# Altium PCB ScopeDefl.PcbDoc
Units mil, origin at the board's own origin, x right, y up, seen from the top; angles counter-clockwise.
Board outline 3100 x 2900 mil, 2 copper layers (Top Layer, Bottom Layer); 70 components, 48 nets, 171 pads, 29 vias.
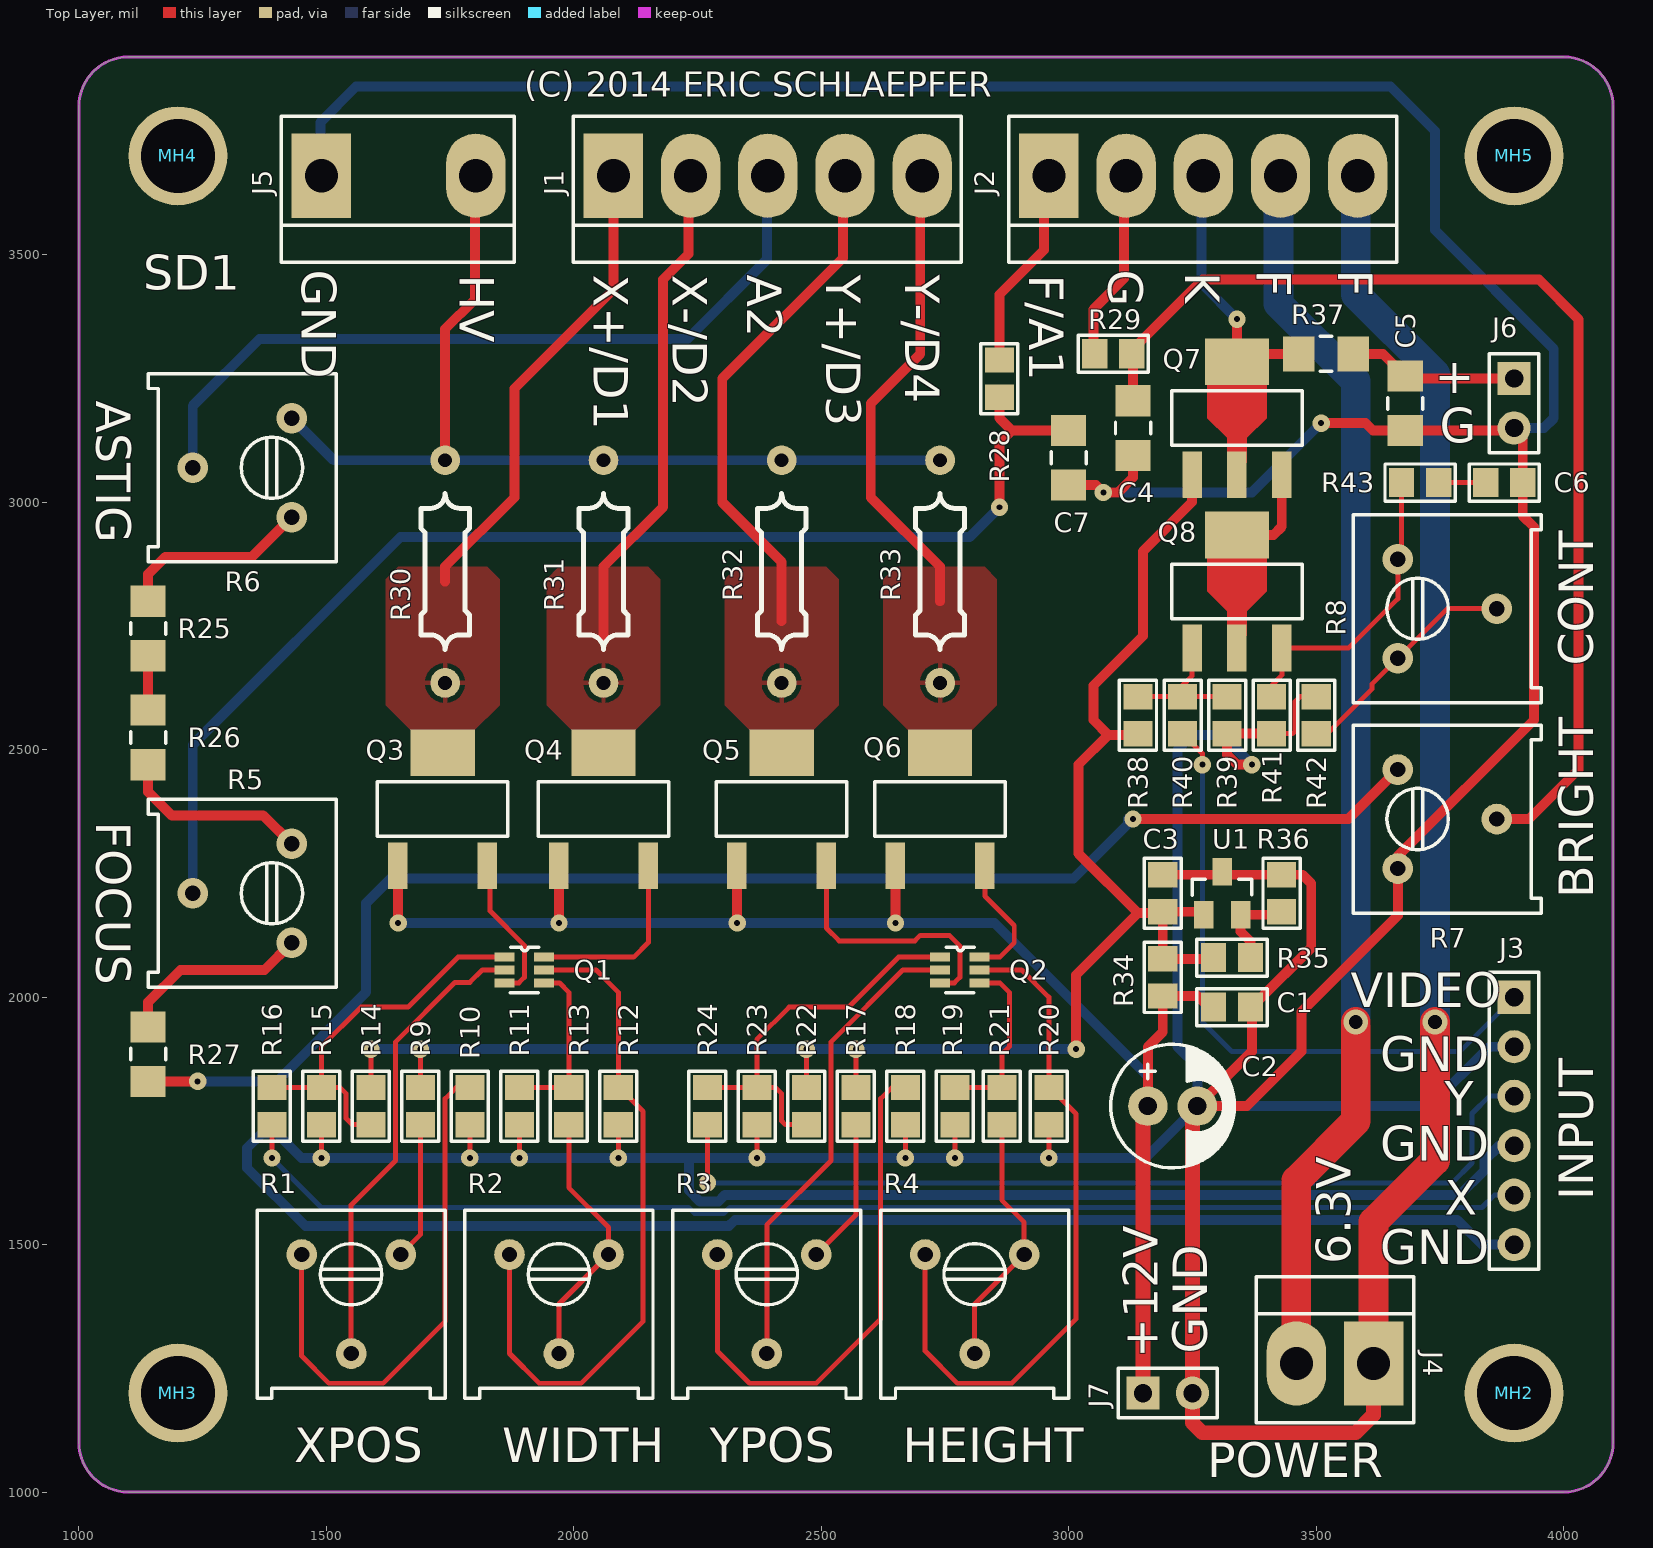
[diagram p0: Top Layer view]
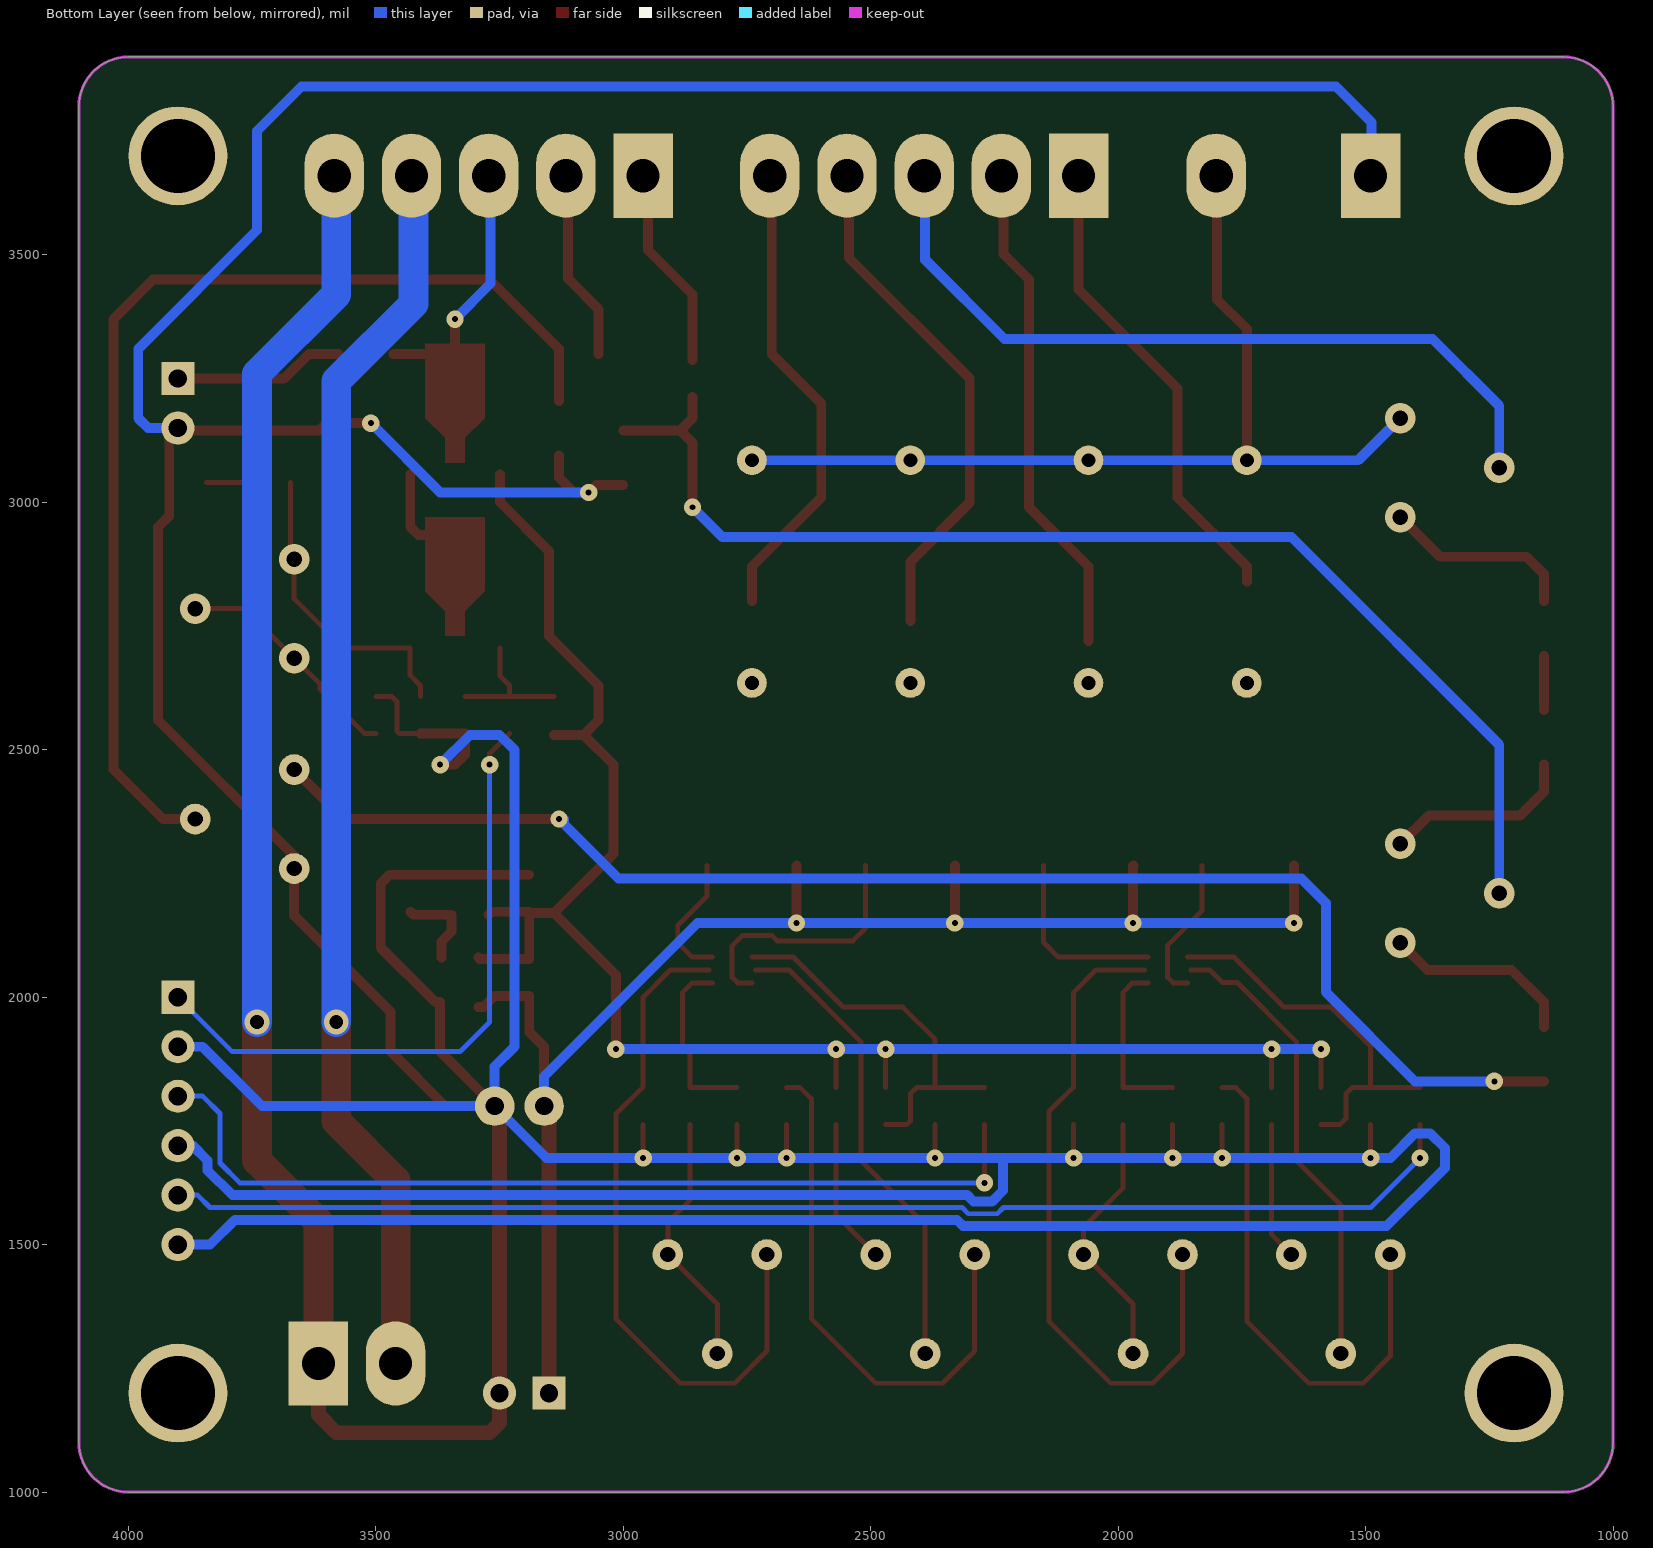
[diagram p1: Bottom Layer view, seen from below]

## Layer stack, top to bottom
Top Solder: solder mask 0.4, Solder Resist, Dk 3.5
Top Layer: signal copper 1.4
Dielectric 1: dielectric 12.6, FR-4, Dk 4.8
Bottom Layer: signal copper 1.4
Bottom Solder: solder mask 0.4, Solder Resist, Dk 3.5

## Board outline
1000,1100 1000,3800 cw(c1100,3800) 1100,3900 4000,3900 cw(c4000,3800) 4100,3800 4100,1100 cw(c4000,1100) 4000,1000 1100,1000 cw(c1100,1100) 1000,1100

## Design rules (kind name [scope] priority, off if disabled: settings)
Clearance Clearance_HV [InNetClass('HV')] p1: gap=80
Clearance [All] p2: gap=8
HoleSize [All] p1: absolutevalues=TRUE maxlimit=150 minlimit=12 maxpercent=80.000 minpercent=20.000
PolygonConnect [InComponent('Q3') or InComponent('Q4') or InComponent('Q5') or InComponent('Q6')] p1: connectstyle=Direct reliefconductorwidth=10 reliefentries=4 polygonreliefangle="90 Angle" airgapwidth=10
PolygonConnect PolygonConnect_1 [All] p2: connectstyle=Relief reliefconductorwidth=10 reliefentries=4 polygonreliefangle="90 Angle" airgapwidth=10
RoutingVias [All] p1: holewidth=12 width=35 viastyle="Through Hole" minholewidth=12 minwidth=35 maxholewidth=28 maxwidth=50
ShortCircuit [InComponent('JP1')] p1: allowed=TRUE
ShortCircuit ShortCircuit_1 [All] p2: allowed=FALSE
SolderMaskExpansion [All] p1: expansion=4
Width [All] p1: maxlimit=100 minlimit=10 preferedwidth=10 minimp=50.000000 maximp=50.000000 favimp=50.000000
27 further rules are at their usual default settings.

## Classes and differential pairs
component class ScopeDefl: C1 C2 C3 C4 C5 C6 C7 J1 J2 J3 J4 J5 J6 J7 Q1 Q2 Q3 Q4 Q5 Q6 Q7 Q8 R1 R2 R3 R4 R5 R6 R7 R8 R9 R10 R11 R12 R13 R14 R15 R16 R17 R18 R19 R20 R21 R22 R23 R24 R25 R26 R27 R28 R29 R30 R31 R32 R33 R34 R35 R36 R37 R38 R39 R40 R41 R42 R43 U1
net class HV: FOCUS HV NetC7_1 NetJ1_1 NetJ1_2 NetJ1_3 NetJ1_4 NetJ1_5 NetR5_1 NetR5_2 NetR6_2 NetR25_1

## Components (designator, comment, footprint, x,y, rotation, side; value= is the part's Value field where it differs from the comment)
C1 "Cap" G_0805[2012] 3330,1980 r180 top
C2 "Cap Pol2" CAP_R100x250 3210,1780 r0 top
C3 "Cap" G_0805[2012] 3190,2210 r270 top
C4 "Cap" G_1206[3216] 3130,3150 r270 top
C5 "Cap" G_1206[3216] 3680,3200 r270 top
C6 "Cap" G_0805[2012] 3880,3040 r0 top
C7 "Cap" G_1206[3216] 3000,3090 r270 top
J1 "CON5" HDR5S156 2080,3660 r90 top
J2 "CON5" HDR5S156 2960,3660 r90 top
J3 "CON6" HDR6S 3900,2000 r0 top
J4 "6.3VAC" HDR2S156 3616,1260 r270 top
J5 "HV" HDR3S156M1 1490,3660 r90 top
J6 "60V" HDR2S 3900,3250 r0 top
J7 "12V" HDR2S 3150,1200 r90 top
MH2 "Comment" M_MTHOLE 3900,1200 r0 top
MH3 "Comment" M_MTHOLE 1200,1200 r0 top
MH4 "Comment" M_MTHOLE 1200,3700 r0 top
MH5 "Comment" M_MTHOLE 3900,3700 r0 top
Q1 "DMMT3904" G_SC70 1900,2055 r270 top
Q2 "DMMT3904" G_SC70 2780,2055 r270 top
Q3 "STN0214" G_SOT223TNC 1735,2380 r90 top
Q4 "STN0214" G_SOT223TNC 2060,2380 r90 top
Q5 "STN0214" G_SOT223TNC 2420,2380 r90 top
Q6 "STN0214" G_SOT223TNC 2740,2380 r90 top
Q7 "NPN" G_SOT223T 3340,3170 r90 top
Q8 "NPN" G_SOT223T 3340,2820 r90 top
R1 "XPOS" "POT_TRIM BOURNS 3386F" 1550,1380 r0 top
R2 "XWID" "POT_TRIM BOURNS 3386F" 1970,1380 r0 top
R3 "YPOS" "POT_TRIM BOURNS 3386F" 2390,1380 r0 top
R4 "YWID" "POT_TRIM BOURNS 3386F" 2810,1380 r0 top
R5 "FOCUS" "POT_TRIM BOURNS 3386F" 1330,2210 r270 top
R6 "ASTIG" "POT_TRIM BOURNS 3386F" 1330,3070 r270 top
R7 "BRIGHT" "POT_TRIM BOURNS 3386F" 3765,2360 r90 top
R8 "CONT" "POT_TRIM BOURNS 3386F" 3765,2785 r90 top
R9 "Res1" G_0805[2012] 1690,1780 r90 top
R10 "Res1" G_0805[2012] 1790,1780 r90 top
R11 "Res1" G_0805[2012] 1890,1780 r90 top
R12 "Res1" G_0805[2012] 2090,1780 r90 top
R13 "Res1" G_0805[2012] 1990,1780 r90 top
R14 "Res1" G_0805[2012] 1590,1780 r270 top
R15 "Res1" G_0805[2012] 1490,1780 r270 top
R16 "Res1" G_0805[2012] 1390,1780 r270 top
R17 "Res1" G_0805[2012] 2570,1780 r270 top
R18 "Res1" G_0805[2012] 2670,1780 r270 top
R19 "Res1" G_0805[2012] 2770,1780 r270 top
R20 "Res1" G_0805[2012] 2960,1780 r270 top
R21 "Res1" G_0805[2012] 2865,1780 r270 top
R22 "Res1" G_0805[2012] 2470,1780 r90 top
R23 "Res1" G_0805[2012] 2370,1780 r90 top
R24 "Res1" G_0805[2012] 2270,1780 r90 top
R25 "Res1" G_1206[3216] 1140,2745 r90 top
R26 "Res1" G_1206[3216] 1140,2525 r90 top
R27 "Res1" G_1206[3216] 1140,1885 r90 top
R28 "Res1" G_0805[2012] 2860,3250 r270 top
R29 "Res1" G_0805[2012] 3090,3300 r0 top
R30 "PR01000102203JR500" RES450X100 1740,2860 r90 top
R31 "PR01000102203JR500" RES450X100 2060,2860 r90 top
R32 "PR01000102203JR500" RES450X100 2420,2860 r90 top
R33 "PR01000102203JR500" RES450X100 2740,2860 r90 top
R34 "Res1" G_0805[2012] 3190,2040 r270 top
R35 "Res1" G_0805[2012] 3330,2080 r0 top
R36 "Res1" G_0805[2012] 3430,2210 r90 top
R37 "Res1" G_1206[3216] 3520,3300 r0 top
R38 "Res1" G_0805[2012] 3140,2570 r90 top
R39 "Res1" G_0805[2012] 3320,2570 r270 top
R40 "Res1" G_0805[2012] 3230,2570 r90 top
R41 "Res1" G_0805[2012] 3410,2570 r270 top
R42 "Res1" G_0805[2012] 3500,2570 r90 top
R43 "Res1" G_0805[2012] 3710,3040 r0 top
U1 "ZTL431A" G_SOT23 3310,2210 r0 top

## Footprints (in the part's own frame and the unit in brackets; to place one, negate y for a bottom-side part, rotate by r counter-clockwise, add the part's x,y. Pads: shape width x height; smd on the part's side, far side on the other; paste and mask are expansions set on the pad)
CAP_R100x250 [mil]
  round 80 hole 37: 1(-50,0) 2(50,0)
  silkscreen extent -125,-125 125,125, body extent -125,-125 125,125
G_0805[2012] [mm] "Generic 0805"
  rect 1.3x1.5 smd: 1(-0.95,0) 2(0.95,0)
  silkscreen extent -1.8,-0.95 1.8,0.95, body extent -1,-0.6 1,0.6
G_1206[3216] [mm] "Generic 1206"
  rect 1.6x1.8 smd: 1(-1.4,0) 2(1.4,0)
  silkscreen extent -0.3,-0.9 0.3,0.9, body extent -1.6,-0.8 1.6,0.8
G_SC70 [mil]
  rect 18x40 smd: 1(-26,-40) 2(0,-40) 3(26,-40) 4(26,40) 5(0,40) 6(-26,40)
  silkscreen extent -46,-28 46,29, body extent -41,-30 41,30
G_SOT23 [mm]
  rect 1x1.4 smd: 1(-0.95,-1.1) 2(0.95,-1.1) 3(0,1.1)
  silkscreen extent -1.52,-0.1 1.52,0.71, body extent -1.45,-0.64 1.45,0.64
G_SOT223T [mm] "SOT223, 4-Leads, Body 6.5x3.5mm, Pitch 2.3mm, Lead Span 7mm, IPC Medium Density"
  rect 2.4x1 smd: B(-2.9,2.3) C(-2.9,0) E(-2.9,-2.3)
  rect 2.4x3.3 smd: C(2.9,0)
  silkscreen extent -1.4,-3.35 1.4,3.35, body extent -1.85,-3.35 1.85,3.35, height 1.8
G_SOT223TNC [mm] "SOT223, 3-Leads, Body 6.5x3.5mm, Pitch 2.3mm, Lead Span 7mm, IPC Medium Density"
  rect 2.4x1 smd: B(-2.9,2.3) E(-2.9,-2.3)
  rect 2.4x3.3 smd: C(2.9,0)
  silkscreen extent -1.4,-3.35 1.4,3.35, body extent -1.85,-3.35 1.85,3.35, height 1.8
HDR2S [mil]
  rect 67x67 hole 37: 1(0,0)
  round 67 hole 37: 2(0,-100)
  silkscreen extent -50,-150 50,50
HDR2S156 [mil]
  rect 170x120 hole 67: 1(0,0)
  oval 170x120 hole 67: 2(0,-156)
  silkscreen extent -175,-237 120,81, body extent -194,-231 200,75, height 585
HDR3S156M1 [mil]
  rect 170x120 hole 67: 1(0,0)
  oval 170x120 hole 67: 2(0,-312)
  silkscreen extent -175,-390 120,81
HDR5S156 [mil]
  rect 170x120 hole 67: 1(0,0)
  oval 170x120 hole 67: 2(0,-156) 3(0,-312) 4(0,-468) 5(0,-624)
  silkscreen extent -175,-703 120,81
HDR6S [mil]
  rect 67x67 hole 37: 1(0,0)
  round 67 hole 37: 2(0,-100) 3(0,-200) 4(0,-300) 5(0,-400) 6(0,-500)
  silkscreen extent -50,-550 50,50
M_MTHOLE [mil]
  round 200 hole 150: 1(0,0)
"POT_TRIM BOURNS 3386F" [mil]
  round 62 hole 31: 1(-100,100) 2(100,100) 3(0,-100)
  silkscreen extent -190,-190 190,190, body extent -190,-190 190,190
RES450X100 [mil] "Resistor, 450mil x 100mil"
  round 60 hole 28: 1(-225,0) 2(225,0)
  silkscreen extent -157,-49 157,49

## Part data
C1 C3 C4 C5 C6 C7: "Capacitor"
C2: library part CapP, "Polarized Capacitor"
J1 J2 J3: "Connector, 5 pin"
J4 J5 J6 J7: library part CON2, "Connector, 2 pin"
Q1 Q2: library part NPN_DUAL2, "NPN Dual Bipolar Transistor"
Q3 Q4 Q5 Q6: library part NPN, "NPN Bipolar Transistor"
Q7 Q8: "NPN Bipolar Transistor"
R1 R2 R3 R4 R5 R6 R7 R8: library part Pot, "Variable Resistor"
R9 R10 R11 R12 R13 R14 R15 R16 R17 R18 R19 R20 R21 R22 R23 R24 R25 R26 R27 R28 R29 R30 R31 R32 R33 R34 R35 R36 R37 R38 R39 R40 R41 R42 R43: library part Res, "Resistor"
U1: library part TL431, "Adjustable Shunt Reg"

## Via types
v1: diameter 35, hole 12, Top Layer to Bottom Layer, tented both sides, 27 vias
v2: diameter 50, hole 28, Top Layer to Bottom Layer, tented both sides, 2 vias

## Nets (pads, with @x,y where several pads share a name; then routed paths per layer and width w, separated by ;. In a path a pad name is that pad's centre, name@x,y a point inside that pad or via, vN(x,y) a via of type N, cw(c..) or ccw(c..) an arc to the next point about the centre after c; other vN are vias at no path point)
CATHODE: J2.3 Q7.C R37.1 | length 492.1
  Top Layer w20: v1(3340,3370) 3340,3284.17 3355.83,3300 R37.1
  Bottom Layer w20: J2.3@3268,3615 3268,3442 v1(3340,3370)
FIL1: J2.4 J4.2 | length 2469.3
  Top Layer w60: J4.2 3460,1630 3580,1750 v2(3580,1950)
  Bottom Layer w60: J2.4@3424,3615 3424,3401 3580,3245 v2(3580,1950)
FOCUS: J2.1 R28.1 | length 367.4
  Top Layer w20: R28.1 2860,3420 2950,3510 2950,3609 J2.1@2956,3615
GND: C1.1 C2.2 C3.1 C4.2 C5.2 C6.2 C7.2 J2.5 J3.2 J3.4 J3.6 J4.1 J5.1 J6.2 J7.2 R7.1 R10.1 R11.1 R12.1 R15.2 R18.2 R19.2 R20.2 R23.1 R36.2 R39.2 R41.2 R42.2 U1.3 | length 19498.8
  Top Layer w10: v1(1490,1675) R15.2 ; v1(1790,1675) R10.1 ; v1(1890,1675) R11.1 ; v1(2090,1675) R12.1 ; v1(2370,1675) R23.1 ; v1(2670,1675) R18.2 ; v1(2770,1675) R19.2 ; v1(2960,1675) R20.2 ; R41.2 3452.6,2532.6 3457.47,2537.47 3457.47,2597.47 3467.4,2607.4 R42.2
  Top Layer w20: C7.2 3055.12,3034.88 v1(3070,3020) 3100,3020 3130,3050 C4.2 ; C3.1 3315.91,2247.4 R36.2 3472.6,2247.4 3490,2230 3490,2100 3380,1990 3370,1990 3370,1890 C2.2 ; C2.2@3250,1770 C2.2 ; v1(3370,2470) 3340,2470 3320,2490 R39.2 R41.2 ; v1(3510,3160) 3600,3160 3615.12,3144.88 C5.2 3894.88,3144.88 J6.2 3917.4,3132.6 C6.2 3917.4,2972.6 3940,2950 3940,2560 3665,2285 R7.1 3665,2165 3470,1970 3470,1890 3360,1780 C2.2
  Top Layer w30: C2.2@3250,1770 J7.2 3250,1140 3270,1120 3580,1120 3616,1156 J4.1@3616,1305
  Top Layer w60: J4.1@3616,1305 3616,1546 3740,1670 v2(3740,1950)
  Bottom Layer w20: J5.1@1488,3615 1488,3768 1560,3840 3650,3840 3740,3750 3740,3550 3980,3310 3980,3170 3960,3150 J6.2 ; v1(3070,3020) 3370,3020 v1(3510,3160) ; v1(3370,2470) 3310,2530 3250,2530 3220,2500 3220,1900 3260,1860 C2.2 ; J3.6 3835,1500 3785,1550 2325.71,1550 2313.21,1537.5 1457.5,1537.5 1340,1655 1340,1695 1370,1725 1400,1725 1450,1675 v1(1490,1675) v1(1790,1675) v1(1890,1675) v1(2090,1675) 2230,1675 ; J3.4 3870,1700 3840,1670 3840,1650 3790,1600 2305,1600 2292.5,1587.5 2254.47,1587.5 2232.5,1609.47 2232.5,1672.5 2230,1675 ; J3.2 3850,1900 3730,1780 C2.2 ; 2230,1675 v1(2370,1675) v1(2670,1675) v1(2770,1675) v1(2960,1675) 3155,1675 C2.2
  Bottom Layer w60: J2.5@3580,3615 3580,3420 3740,3260 v2(3740,1950)
GRID: J2.2 R29.1 | length 340.7
  Top Layer w20: R29.1@3050,3300 3050,3390 3112,3452 J2.2@3112,3615
HV: J5.2 R6.1 R30.2 R31.2 R32.2 R33.2 | length 1900.1
  Top Layer w20: R30.2 1740,3350 1800,3410 J5.2@1800,3615
  Bottom Layer w20: R6.1 1515,3085 R30.2 R31.2 R32.2 R33.2
NetC4_1: C4.1 R7.3 R29.2 | length 2212.4
  Top Layer w20: C4.1 3130,3310 3270,3450 3950,3450 4030,3370 4030,2460 3930,2360 R7.3
NetC5_1: C5.1 J6.1 R37.2 | length 345.6
  Top Layer w20: R37.2 3635.12,3300 C5.1 3685.12,3250 J6.1
NetC6_1: C6.1 R43.2 | length 95.2
  Top Layer w10: R43.2 C6.1
NetC7_1: C7.1 R5.3 R28.2 | length 2494.2
  Top Layer w20: v1(2860,2990) 2860,3120.24 2884.88,3145.12 ; R28.2 2860,3170 2884.88,3145.12 ; C7.1 2884.88,3145.12
  Bottom Layer w20: R5.3 1230,2510 1650,2930 2800,2930 v1@2865,2995
NetJ1_1: J1.1 Q3.C R30.1 | length 960.8
  Top Layer w20: 1740,2840 1740,2870 1880,3010 1880,3230 2080,3430 J1.1
NetJ1_2: J1.2 Q4.C R31.1 | length 1011.2
  Top Layer w20: 2060,2720 2060,2870 2180,2990 2180,3450 2232,3502 J1.2@2232,3660
NetJ1_3: J1.3 R6.3 | length 1567.2
  Bottom Layer w20: R6.3 1230,3195 1365,3330 2230,3330 2390,3490 J1.3@2390,3650
NetJ1_4: J1.4 Q5.C R32.1 | length 1050.8
  Top Layer w20: 2420,2760 2420,2880 2300,3000 2300,3250 2544,3494 J1.4@2544,3660
NetJ1_5: J1.5 Q6.C R33.1 | length 959.4
  Top Layer w20: J1.5@2700,3660 2700,3300 2600,3200 2600,3010 2740,2870 2740,2800
NetJ3_3: J3.3 R24.1 | length 1902.3
  Top Layer w10: v1(2270,1625) R24.1
  Bottom Layer w10: v1(2270,1625) 3775,1625 3815,1665 3815,1765 3850,1800 J3.3 J3.3@3900,1776.36
NetJ3_5: J3.5 R16.2 | length 2639.7
  Top Layer w10: v1(1390,1675) R16.2
  Bottom Layer w10: v1(1390,1675) 1490,1575 2231.61,1575 2244.11,1562.5 2302.86,1562.5 2315.36,1575 3835,1575 3860,1600 J3.5
NetQ1_1: Q1.1 R14.2 R15.1 R16.1 | length 787.8
  Top Layer w10: R16.1 R15.1 ; R14.2 1552.4,1742.6 1540,1755 1540,1805 1527.6,1817.4 R15.1 ; Q1.1 1766,2081 1665,1980 1570,1980 1490,1900 R15.1
NetQ1_2: Q1.2 R1.3 | length 940.1
  Top Layer w10: R1.3 1550,1580 1640,1670 1640,1910 1760,2030 1790,2030 1815,2055 Q1.2@1852.76,2055
NetQ1_3: Q1.3 Q3.E | length 299.1
  Top Layer w10: Q3.E@1830.55,2265.83 1830.55,2174.45 1900,2105 1900,2040 1889,2029 Q1.3
NetQ1_4: Q1.4 R11.2 R13.2 | length 350.5
  Top Layer w10: R11.2 R13.2 1990,2010 1971,2029 Q1.4
NetQ1_5: Q1.5 R2.1 R12.2 | length 1394.6
  Top Layer w10: R2.1 1870,1280 1930,1220 2015,1220 2140,1345 2140,1768.93 2091.53,1817.4 R12.2 2090,1915 2090,2010 2045,2055 Q1.5@1947.24,2055
NetQ1_6: Q1.6 Q4.E | length 378.1
  Top Layer w10: Q1.6 2121,2081 2150.55,2110.55 Q4.E
NetQ2_1: Q2.1 R22.1 R23.2 R24.2 | length 799.6
  Top Layer w10: R24.2 R23.2 ; R22.1 2427.4,1742.6 2420,1750 2420,1805 2407.6,1817.4 R23.2 ; Q2.1 2656,2081 2555,1980 2435,1980 2370,1915 R23.2
NetQ2_2: Q2.2 R3.3 | length 956.7
  Top Layer w10: R3.3 2390,1540 2520,1670 2520,1910 2665,2055 Q2.2@2732.76,2055
NetQ2_3: Q2.3 Q5.E | length 528.3
  Top Layer w10: Q5.E 2510.55,2139.45 2536.25,2113.75 2689.08,2113.75 2700.33,2125 2758.77,2125 2780,2103.77 2780,2040 2769,2029 Q2.3
NetQ2_4: Q2.4 R19.1 R21.1 | length 361.7
  Top Layer w10: R19.1 R21.1 2865,1885 2880,1900 2880,2010 2861,2029 Q2.4
NetQ2_5: Q2.5 R4.1 R20.1 | length 1410
  Top Layer w10: R4.1 2710,1285 2775,1220 2885,1220 3015,1350 3015,1763.93 2961.53,1817.4 R20.1 2960,1880 2960,2000 2905,2055 Q2.5@2827.24,2055
NetQ2_6: Q2.6 Q6.E | length 262.5
  Top Layer w10: Q2.6 2861,2081 2890,2110 2890,2145 2830.55,2204.45 Q6.E
NetQ7_E: Q7.E Q8.C | length 202.6
  Top Layer w20: Q8.C@3340,2934.17 3414.17,2934.17 3430.55,2950.55 Q7.E
NetQ8_B: Q8.B R38.2 R39.1 R40.2 | length 286.5
  Top Layer w10: R38.2 R40.2 ; Q8.B 3249.45,2649.45 3230,2630 R40.2 ; R39.1 R40.2
NetQ8_E: Q8.E R8.2 R41.1 R43.1 | length 620.6
  Top Layer w10: R41.1 3410,2630 3430.55,2650.55 Q8.E 3565.83,2705.83 3665,2805 R8.2 3672.6,2892.6 R43.1
NetR1_1: R1.1 R10.2 | length 1078.8
  Top Layer w10: R1.1 1450,1275 1505,1220 1615,1220 1740,1345 1740,1795 1762.4,1817.4 R10.2
NetR1_2: R1.2 R9.1 | length 279.2
  Top Layer w10: R1.2 1690,1520 R9.1
NetR2_2: R2.2 R2.3 R13.1 | length 537.2
  Top Layer w10: R2.3 1970,1380 R2.2 2070,1535 1990,1615 R13.1
NetR3_1: R3.1 R18.1 | length 1110.1
  Top Layer w10: R3.1 2290,1285 2355,1220 2490,1220 2620,1350 2620,1795 2642.4,1817.4 R18.1
NetR3_2: R3.2 R17.2 | length 295.7
  Top Layer w10: R3.2 2570,1560 R17.2
NetR4_2: R4.2 R4.3 R21.2 | length 522.7
  Top Layer w10: R4.3 2810,1380 R4.2 2910,1545 2865,1590 R21.2
NetR5_1: R5.1 R26.1 | length 388.4
  Top Layer w20: R26.1 1140,2415 1187.5,2367.5 1372.5,2367.5 R5.1
NetR5_2: R5.2 R27.2 | length 389.6
  Top Layer w20: R27.2 1140,1990 1205,2055 1375,2055 R5.2
NetR6_2: R6.2 R25.2 | length 392.5
  Top Layer w20: R25.2 1140,2855 1175,2890 1350,2890 R6.2
NetR7_2: R7.2 R27.1 | length 2897.3
  Top Layer w20: R27.1 1239.88,1829.88 v1(1240,1830) ; v1(3130,2360) 3565,2360 R7.2
  Bottom Layer w20: v1(1240,1830) 1400,1830 1580,2010 1580,2190 1630,2240 3010,2240 3120,2350 3120,2360 v1(3130,2360)
NetR8_1: R8.1 R8.3 R42.1 | length 475.4
  Top Layer w10: R42.1 3522.6,2532.6 3612.6,2622.6 3612.6,2632.6 R8.1 3765,2785 R8.3
NetR25_1: R25.1 R26.2 | length 109.8
  Top Layer w20: R26.2 R25.1
NetR35_2: R35.2 R36.1 U1.2 | length 180
  Top Layer w20: R35.2 3367.4,2112.6 3347.4,2132.6 U1.2 3424.09,2166.69 R36.1
VBIAS: C1.2 C2.1 J7.1 Q3.B Q4.B Q5.B Q6.B R34.2 | length 3098.8
  Top Layer w20: Q3.B 1644.45,2150.55 v1(1645,2150) ; Q4.B 1970,2265.28 v1(1970,2150) ; Q5.B 2330,2265.28 v1(2330,2150) ; Q6.B 2650,2265.28 v1(2650,2150) ; C2.1 3160,1900 3190,1930 R34.2 3260,2002.6 3282.6,1980 C1.2
  Top Layer w30: J7.1 3150,1770 C2.1
  Bottom Layer w20: v1(1645,2150) v1(1970,2150) v1(2330,2150) 2850,2150 3160,1840 C2.1
VCC: C3.2 Q7.B R9.2 R14.1 R17.1 R22.2 R34.1 R35.1 R38.1 U1.1 | length 3511.5
  Top Layer w10: R14.1 v1(1590,1895) ; R9.2 v1(1690,1895) ; R22.2 v1(2470,1895) ; R17.1 v1(2570,1895)
  Top Layer w20: v1(3015,1895) 3015,2045 3140,2170 ; R38.1@3140,2530 3080,2530 ; Q7.B 3249.45,3000.55 3150,2901.1 3150,2730 3050,2630 3050,2560 3080,2530 ; U1.1 3266.69,2172.6 C3.2 C3.2@3190,2170 ; R35.1 3290,2077.4 R34.1 C3.2@3190,2170 ; 3080,2530 3020,2470 3020,2290 3140,2170 ; 3140,2170 C3.2@3190,2170
  Bottom Layer w20: v1(1590,1895) v1(1690,1895) v1(2470,1895) v1(2570,1895) v1(3015,1895)
VIDEO: J3.1 R40.1 | length 1299.6
  Top Layer w10: R40.1 3270,2492.6 v1(3270,2470)
  Bottom Layer w10: v1(3270,2470) 3270,1950 3330,1890 3790,1890 J3.1
pads on no net: MH2.1 MH3.1 MH4.1 MH5.1

## Polygon pours and split planes (outlines as drawn)
NetJ1_1 on Top Layer "Top Overlay-No Net" (solid, pour order 8): 1675,2450 1795,2450 1795,2535 1850,2590 1850,2845 1825,2870 1645,2870 1620,2845 1620,2590 1675,2535
NetJ1_2 on Top Layer "Top Overlay-No Net" (solid, pour order 7): 2000,2450 2120,2450 2120,2535 2175,2590 2175,2845 2150,2870 1970,2870 1945,2845 1945,2590 2000,2535
NetJ1_4 on Top Layer "Top Overlay-No Net" (solid, pour order 6): 2360,2450 2480,2450 2480,2535 2535,2590 2535,2845 2510,2870 2330,2870 2305,2845 2305,2590 2360,2535
NetJ1_5 on Top Layer "Top Overlay-No Net" (solid, pour order 5): 2680,2450 2800,2450 2800,2535 2855,2590 2855,2845 2830,2870 2650,2870 2625,2845 2625,2590 2680,2535

## Keep-outs
Keep-Out Layer:
  the board outline again, w6

## Other copper
Top Layer:
  region net CATHODE: 3280,3320 3280,3170 3320,3130 3320,3080 3360,3080 3360,3130 3400,3170 3400,3320
  region net NetQ7_E: 3280,2970 3280,2820 3320,2780 3320,2730 3360,2730 3360,2780 3400,2820 3400,2970

## Silkscreen, mask and mechanical layers (free items; w line width, h text height)
Top Overlay:
  text "(C) 2014 ERIC SCHLAEPFER" at 1900,3820 h50
  text "GND" at 1450,3470 h70 r270
  text "G" at 3080,3470 h70 r270
  text "F" at 3380,3470 h70 r270
  text "F" at 3545,3470 h70 r270
  text "K" at 3235,3465 h70 r270
  text "HV" at 1770,3460 h70 r270
  text "X+/D1" at 2040,3460 h70 r270
  text "X-/D2" at 2200,3460 h70 r270
  text "A2" at 2350,3460 h70 r270
  text "Y+/D3" at 2510,3460 h70 r270
  text "Y-/D4" at 2670,3460 h70 r270
  text "F/A1" at 2920,3460 h70 r270
  text "SD1" at 1130,3430 h70
  text "+" at 3740,3220 h70
  text "ASTIG" at 1035,3205 h70 r270
  text "G" at 3750,3120 h70
  text "CONT" at 4060,2670 h70 r90
  text "FOCUS" at 1035,2355 h70 r270
  text "BRIGHT" at 4060,2200 h70 r90
  text "VIDEO" at 3570,1980 h70
  text "GND" at 3630,1850 h70
  text "Y" at 3760,1760 h70
  text "GND" at 3630,1670 h70
  text "INPUT" at 4060,1590 h70 r90
  text "X" at 3760,1560 h70
  text "6.3V" at 3570,1460 h70 r90
  text "GND" at 3630,1460 h70
  text "GND" at 3280,1280 h70 r90
  text "+12V" at 3180,1270 h70 r90
  text "XPOS" at 1435,1060 h70
  text "WIDTH" at 1855,1060 h70
  text "YPOS" at 2275,1060 h70
  text "HEIGHT" at 2665,1060 h70
  text "POWER" at 3280,1030 h70